# Altium PCB USF-IEEE-CS.PcbDoc
Units mil, origin at the board's own origin, x right, y up, seen from the top; angles counter-clockwise.
Board outline 1019 x 1400 mil, 2 copper layers (Top Layer, Bottom Layer); 18 components, 24 nets, 134 pads, 9 vias.
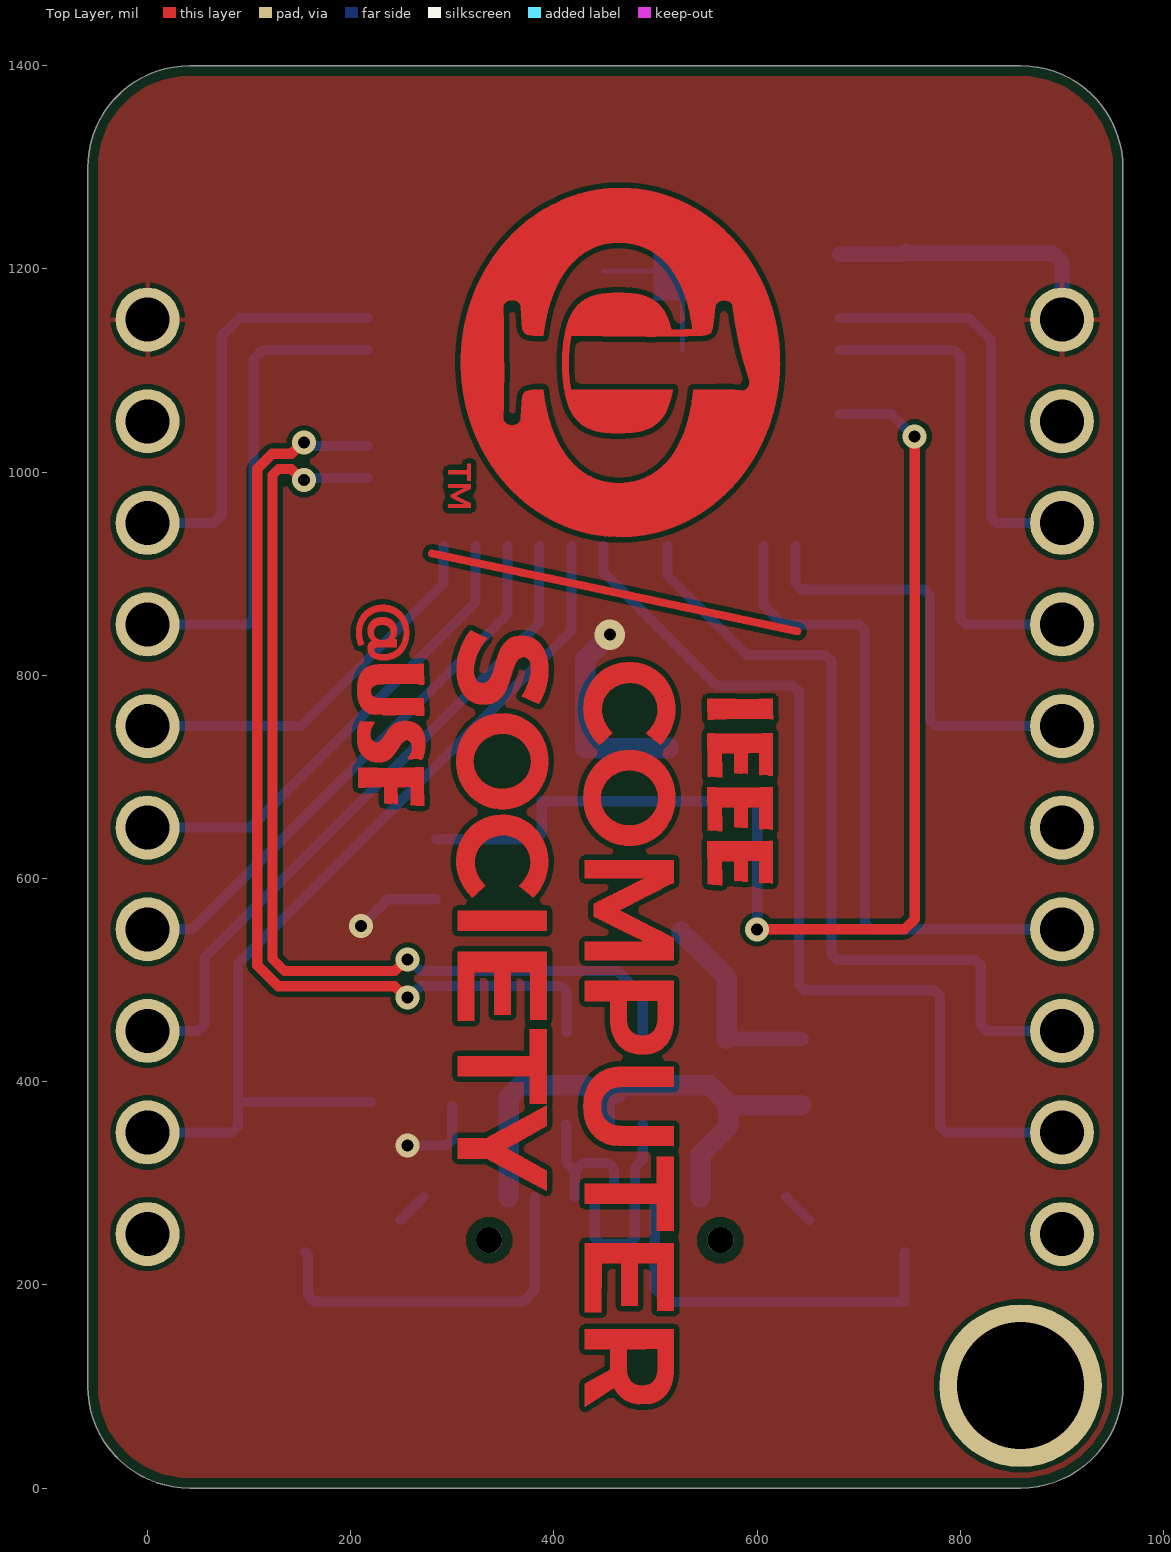
[diagram p0: Top Layer view]
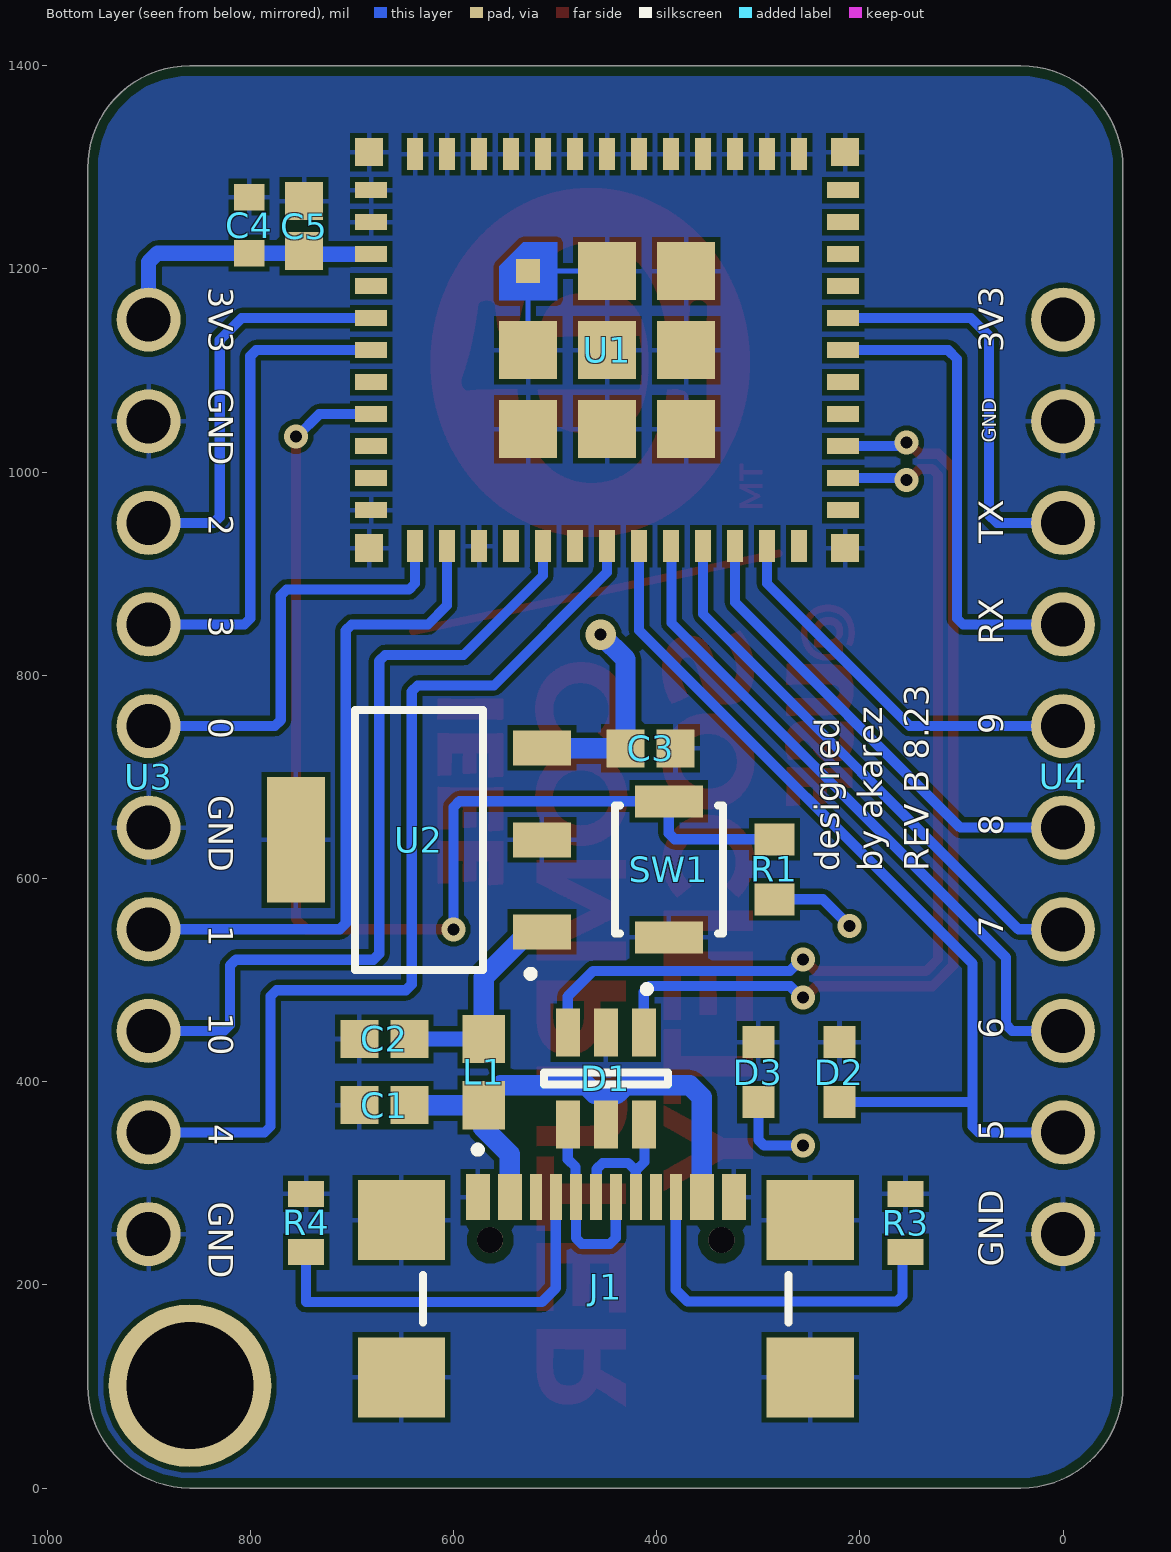
[diagram p1: Bottom Layer view, seen from below]
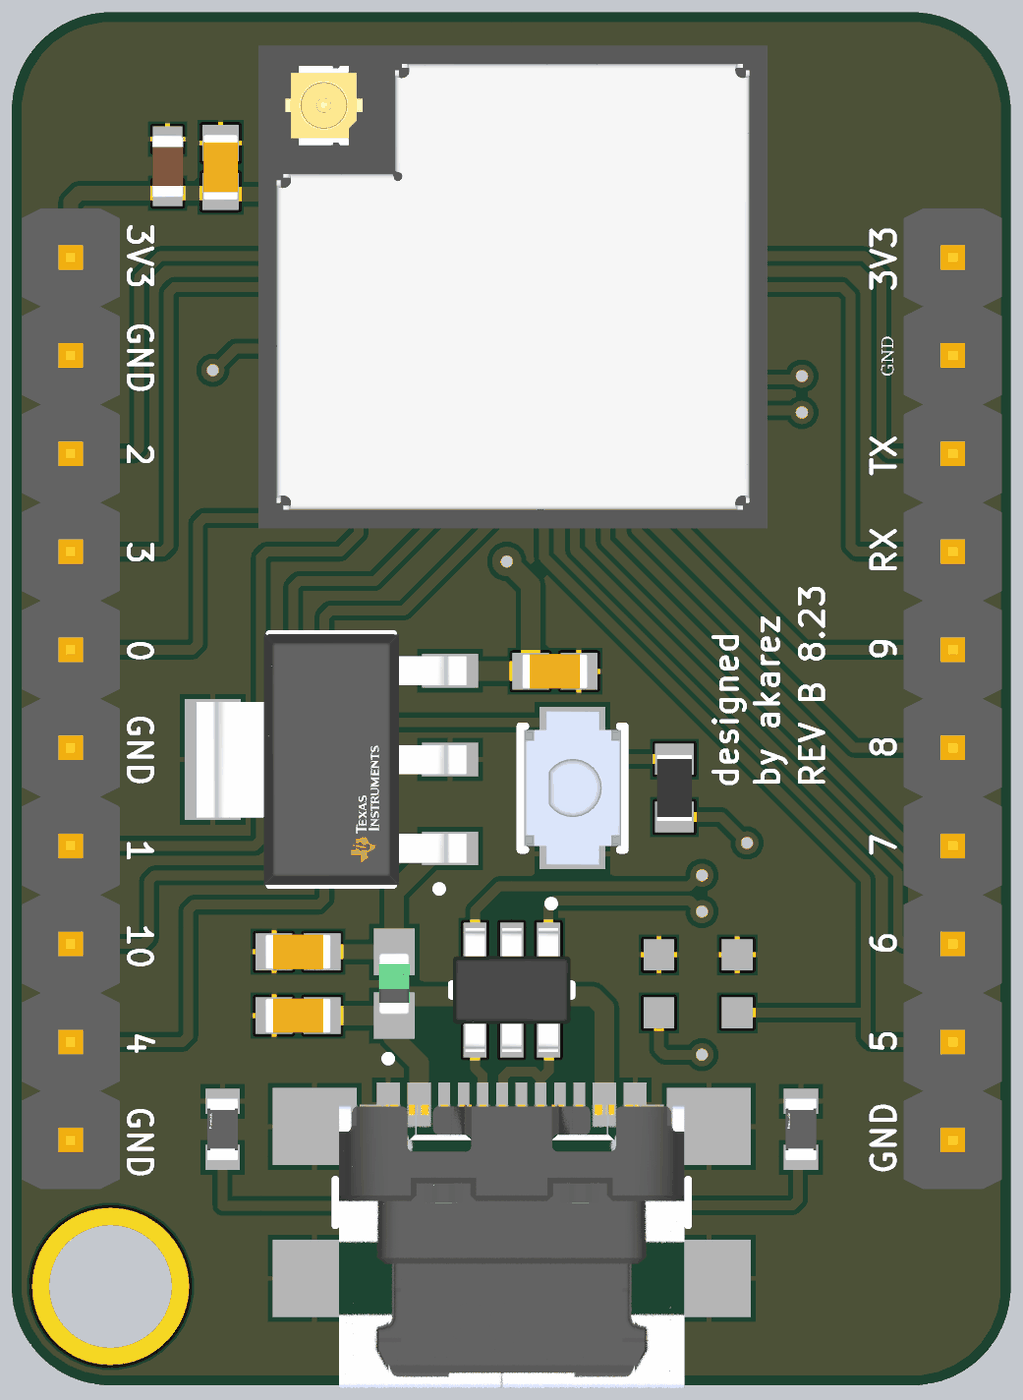
[diagram p2: 3D render of the assembled board from below, using the file's embedded part models]

## Layer stack, top to bottom
Top Solder: solder mask 0.4, Solder Resist, Dk 3.5
Top Layer: signal copper 1.4
Dielectric 1: dielectric 12.6, FR-4, Dk 4.8
Bottom Layer: signal copper 1.4
Bottom Solder: solder mask 0.4, Solder Resist, Dk 3.5

## Board outline
-58.94,100.32 ccw(c41.38,100.32) 41.38,0 859.29,0 ccw(c859.29,100.71) 960,100.71 960,1299.29 ccw(c859.29,1299.29) 859.29,1400 41.71,1400 ccw(c41.71,1299.29) -59,1299.29

## Design rules (kind name [scope] priority, off if disabled: settings)
BoardOutlineClearance [All] p1: gap=7.87 ignorepadtopadclearanceinfootprint=FALSE except(10: Arc-OutlineEdge Track-OutlineEdge SMDPad-OutlineEdge THPad-OutlineEdge Via-OutlineEdge Fill-OutlineEdge Poly-OutlineEdge Region-OutlineEdge Text-OutlineEdge)
Clearance [All] p1: gap=5 ignorepadtopadclearanceinfootprint=FALSE except(9.84: Arc-Hole Track-Hole SMDPad-Hole THPad-Hole Via-Hole Fill-Hole Poly-Hole Region-Hole Text-Hole)
ComponentClearance [All] p1: gap=5 collisioncheckmode=3 verticalgap=5 showdistances=TRUE
DiffPairsRouting [All] p1: maxlimit=10 minlimit=5 mostfreqgap=5 toplayer_minwidth=5 toplayer_maxwidth=1000 toplayer_prefwidth=5 bottomlayer_minwidth=5 bottomlayer_maxwidth=1000 bottomlayer_prefwidth=5 maxuncoupledlength=500
Height [All] p1: minheight=0 maxheight=71497.94 prefheight=500
HoleSize [All] p1: absolutevalues=TRUE maxlimit=248.03 minlimit=11.81 maxpercent=80.000 minpercent=20.000
HoleToHoleClearance [All] p1: gap=9.84 allowstackedmicrovias=FALSE
MinimumAnnularRing [All] p1: minimumring=3
MinimumSolderMaskSliver [All] p1: minsoldermaskwidth=0
PlaneClearance [All] p1: clearance=5
PlaneConnect PlaneConnectPowerPads [InPadClass('PowerPads')] p1: planeconnectstyle=Direct reliefexpansion=20 reliefentries=4 reliefconductorwidth=10 reliefairgap=10
PlaneConnect [All] p2: pad.planeconnectstyle=Relief pad.reliefexpansion=11.81 pad.reliefentries=4 pad.reliefconductorwidth=5 pad.reliefairgap=5 via.planeconnectstyle=Direct via.reliefexpansion=11.81 via.reliefentries=4 via.reliefconductorwidth=5 via.reliefairgap=5
PolygonConnect PolygonConnectPowerPads [All vs (InPadClass('PowerPads'))] p1: connectstyle=Direct reliefconductorwidth=10 reliefentries=4 polygonreliefangle="90 Angle" airgapwidth=10
PolygonConnect [All] p2: thpad.connectstyle=Relief thpad.reliefconductorwidth=5 thpad.reliefentries=4 thpad.polygonreliefangle="90 Angle" thpad.airgapwidth=5 smdpad.connectstyle=Relief smdpad.reliefconductorwidth=5 smdpad.reliefentries=4 smdpad.polygonreliefangle="90 Angle" smdpad.airgapwidth=5 via.connectstyle=Direct via.reliefconductorwidth=5 via.reliefentries=4 via.polygonreliefangle="90 Angle" via.airgapwidth=5
RoutingVias [All] p1: holewidth=11.81 width=23.62 viastyle="Through Hole" minholewidth=11.81 minwidth=23.62 maxholewidth=23.62 maxwidth=259.84
SilkToSilkClearance [All] p1: silktosilkclearance=0
SilkToSolderMaskClearance [IsPad] p1: minsilkscreentomaskgap=5 clearancetoexposedcopper=TRUE
SolderMaskExpansion [All] p1: expansion=2.95 istentingtop=FALSE
Width [All] p1: maxlimit=1000 minlimit=5 preferedwidth=5 minimp=50.000000 maximp=50.000000 favimp=50.000000
20 further rules are at their usual default settings.

## Classes and differential pairs
differential pair USB_D: +USB_D_P -USB_D_N
differential pair MCU_USB_D: +MCU_USB_D_P -MCU_USB_D_N

## Components (designator, comment, footprint, x,y, rotation, side; value= is the part's Value field where it differs from the comment)
C1 "Capacitor 100 nF +/-10% 50 V 0603" CAPC1608X90X40NL10T20 668,376.88 r0 bottom value=100nF
C2 "Capacitor 100 nF +/-10% 50 V 0603" CAPC1608X90X40NL10T20 668,442 r0 bottom value=100nF
C3 "Capacitor 100 nF +/-10% 50 V 0603" CAPC1608X90X40NL10T20 406,728 r180 bottom value=100nF
C4 "Capacitor 10µF +/-20% 10V 0603" CAPC0603(1608)100_L 801,1243 r270 bottom value=10µF
C5 "Capacitor 100 nF +/-10% 50 V 0603" CAPC1608X90X40NL10T20 747,1242 r270 bottom value=100nF
D1 "USBLC6-2SC6" STM-SOT23-6L_V 450,403 r270 bottom
D2 "LTST-C190AKT" LTST-C190AKT-2_V 220,409.4 r90 bottom
D3 "LTST-C190TBKT" LTST-C190TBKT-2_V 299.87,409.4 r90 bottom
J1 "USB4110-GF-A" FP-USB4110-GF-A-MFG 450,141.48 r180 bottom
L1 "LQG18HN2N2S00D" FP-LQG18HH_00-IPC_A 570,409.4 r90 bottom
R1 "Resistor 10k +/-1% 0603 100 mW" RESC1608X55X25ML10T15 284,609 r270 bottom value=10k
R3 "ERA-3AEB512V" FP-ERA3A-MFG 155,261 r90 bottom
R4 "ERA-3AEB512V" FP-ERA3A-MFG 745,261 r90 bottom
SW1 "B3U-1000P" FP-B3U-1000P-MFG 388,609 r90 bottom
U1 "ESP32-C3-MINI-1U-N4" XCVR_ESP32-C3-MINI-1U-N4 448.76,1120 r180 bottom
U2 "LM3940IMP-3.3/NOPB" FP-DCY0004A-IPC_C 634,638 r0 bottom
U3 "61301011121" FP-61301011121-MFG 900,700 r270 bottom
U4 "61301011121" FP-61301011121-MFG 0,700 r270 bottom

## Footprints (in the part's own frame and the unit in brackets; to place one, negate y for a bottom-side part, rotate by r counter-clockwise, add the part's x,y. Pads: shape width x height; smd on the part's side, far side on the other; paste and mask are expansions set on the pad)
CAPC0603(1608)100_L [mm] "Chip Capacitor, Body 1.6x0.8mm, Height 1.0mm, IPC High Density"
  rect 0.66x0.76 smd: 1(-0.7,0) 2(0.7,0)
  body extent -0.8,-0.4 0.8,0.4, height 0.95
CAPC1608X90X40NL10T20 [mm] "Chip Capacitor, 2-Leads, Body 1.70x0.90mm, IPC Medium Density"
  rect 0.95x0.95 smd: 1(-0.625,0) 2(0.625,0)
  body extent -0.85,-0.45 0.85,0.45, height 0.9
FP-61301011121-MFG [mm]
  round 1.6 hole 1.1 paste-1000 mask+0: 1(-11.43,0) 2(-8.89,0) 3(-6.35,0) 4(-3.81,0) 5(-1.27,0) 6(1.27,0) 7(3.81,0) 8(6.35,0) 9(8.89,0) 10(11.43,0)
  body extent -12.7,-1.27 12.7,1.27, height 8.54
FP-B3U-1000P-MFG [mm]
  rect 0.8x1.7 smd paste+0 mask+0: 1(-1.7,0) 2(1.7,0)
  silkscreen extent -1.6,-1.35 1.6,1.35, body extent -2,-1.26 2,1.24, height 1.6
FP-DCY0004A-IPC_C [mm]
  rect 1.454x0.873 smd paste+0 mask+0: 1(-3.075,2.3) 2(-3.075,0) 3(-3.075,-2.3)
  rect 1.454x3.132 smd paste+0 mask+0: 4(3.075,0)
  silkscreen extent -2.84,-3.25 1.6,3.4, body extent -3.5,-3.25 3.5,3.25, height 1.8
FP-ERA3A-MFG [mm]
  rect 0.65x0.9 smd paste+0 mask+0: 1(-0.725,0) 2(0.725,0)
  body extent -0.8,-0.4 0.8,0.4, height 0.55
FP-LQG18HH_00-IPC_A [mil]
  rect 47.48x41.66 smd paste+0 mask+0: 1(-32.52,0) 2(32.52,0)
  body extent -31,-16 31,16, height 37
FP-USB4110-GF-A-MFG [mm]
  rect 2.18x2 smd paste+0 mask+0: 1(-5.11,3.105) 2(5.11,3.105) 3(-5.11,-0.825) 4(5.11,-0.825)
  rect 0.6x1.15 smd paste+0 mask+0: A1-B12(-3.2,3.68) A4-B9(-2.4,3.68) B1-A12(3.2,3.68) B4-A9(2.4,3.68)
  rect 0.3x1.15 smd paste+0 mask+0: A5(-1.25,3.68) A6(-0.25,3.68) A7(0.25,3.68) A8(1.25,3.68) B5(1.75,3.68) B6(0.75,3.68) B7(-0.75,3.68) B8(-1.75,3.68)
  round 0.65 hole 0.65 unplated paste-1000 mask+0: M1(-2.89,2.605) M2(2.89,2.605)
  silkscreen extent -4.57,0.55 4.57,4.92, body extent -5.65,-3.67 5.65,4.01, height 3.21
LTST-C190AKT-2_V [mm] "SMD, 2-Leads, Body 1.6x0.8mm"
  rect 0.8x0.8 smd: 1(-0.75,0) 2(0.75,0)
  body extent -0.8,-0.4 0.8,0.4, height 0.8
LTST-C190TBKT-2_V [mm] "SMD, 2-Leads, Body 1.6x0.8mm"
  rect 0.8x0.8 smd: 1(-0.75,0) 2(0.75,0)
  body extent -0.8,-0.4 0.8,0.4, height 0.8
RESC1608X55X25ML10T15 [mm] "Chip Resistor, 2-Leads, Body 1.70x0.90mm, IPC Low Density"
  rect 0.8x1 smd: 1(-0.75,0) 2(0.75,0)
  body extent -0.85,-0.45 0.85,0.45, height 0.55
STM-SOT23-6L_V [mm] "SOT23, 6-Leads, Body 3.05x1.75mm, Pitch 0.95mm"
  rect 1.2x0.6 smd: 1(-1.15,0.95) 2(-1.15,0) 3(-1.15,-0.95) 4(1.15,-0.95) 5(1.15,0) 6(1.15,0.95)
  silkscreen extent -2.29,-1.55 0.15,1.55, body extent -1.6,-1.53 1.6,1.53, height 1.45
XCVR_ESP32-C3-MINI-1U-N4 [mm]
  rect 0.8x0.4 smd: 1(-5.9,4) 2(-5.9,3.2) 3(-5.9,2.4) 4(-5.9,1.6) 5(-5.9,0.8) 6(-5.9,0) 7(-5.9,-0.8) 8(-5.9,-1.6) 9(-5.9,-2.4) 10(-5.9,-3.2) 11(-5.9,-4) 25(5.9,-4) 26(5.9,-3.2) 27(5.9,-2.4) 28(5.9,-1.6) 29(5.9,-0.8) 30(5.9,0) 31(5.9,0.8) 32(5.9,1.6) 33(5.9,2.4) 34(5.9,3.2) 35(5.9,4)
  rect 0.4x0.8 smd: 12(-4.8,-4.9) 13(-4,-4.9) 14(-3.2,-4.9) 15(-2.4,-4.9) 16(-1.6,-4.9) 17(-0.8,-4.9) 18(0,-4.9) 19(0.8,-4.9) 20(1.6,-4.9) 21(2.4,-4.9) 22(3.2,-4.9) 23(4,-4.9) 24(4.8,-4.9) 36(4.8,4.9) 37(4,4.9) 38(3.2,4.9) 39(2.4,4.9) 40(1.6,4.9) 41(0.8,4.9) 42(0,4.9) 43(-0.8,4.9) 44(-1.6,4.9) 45(-2.4,4.9) 46(-3.2,4.9) 47(-4,4.9) 48(-4.8,4.9)
  rect 0.6x0.6 smd paste-1 mask+0: 49_1(-1.975,1.975)
  rect 1.45x1.45 smd: 49_2(0,1.975) 49_3(1.975,1.975) 49_4(1.975,0) 49_5(1.975,-1.975) 49_6(0,-1.975) 49_7(-1.975,-1.975) 49_8(-1.975,0) 49_9(0,0)
  rect 0.7x0.7 smd: 50(5.95,4.95) 51(5.95,-4.95) 52(-5.95,-4.95) 53(-5.95,4.95)
  Top Layer region: -1.25,1.25 -2.7,1.25 -2.7,2.1 -2.1,2.7 -1.25,2.7
  body extent -6.6,-6.25 6.6,6.25, height 2.55

## Part data
C1 C2 C3 C5: library part CMP-001-00017-6, "Chip Capacitor, 100 nF, +/- 10%, 50 V, 0603 (1608 Metric)", Capacitor Type=Ceramic, Case/Package=0603, Max Operating Temperature=125°C, Min Operating Temperature=-55°C, Tolerance=10%, Voltage Rating=50V, Mounting Technology=SM, Pins=2, RoHS Compliant=True
C4: library part CMP-001-00075-5, "Chip Capacitor, 10µF +/-20%, 10V, 0603, Thickness 1 mm", Case/Package=0603, Max Operating Temperature=85°C, Min Operating Temperature=-55°C, Tolerance=10%, Voltage Rating=10V, Mounting Technology=SMT, Pins=2
D1: library part CMP-2000-05378-1, "Very low capacitance ESD protection, 3.5 pF, -40 to 125 degC, 6-Pin SOT23, RoHS, Tape and Reel", Capacitance Value=3.5pF, Clamping Voltage=17V, Leakage Current=0.15uA, Manufacturer=STMicroelectronics, Operating Temp Range=-40Cto125C, Operating Temperature Classification=Automotive, Operating Temperature Max Deg. C=125C, Operating Temperature Min Deg. C=-40C, Package / Case=SOT-23, Package Description="6-Pin Small Outline Transistor, Body 2.925 x 1.625 mm, Pitch 0.95 mm", Package Reference=SOT23-6L, Peak Pulse Current=5A, Reverse Breakdown Voltage=6V, Reverse Stand-off Voltage=5V, Test Current (It)=1mA, Clamping Voltage (Max)=17V, Configuration=Dual, Datasheet URL=http://www.st.com/st-web-ui/static/active/en/resource/technical/document/datasheet/CD00050750.pdf, Datasheet Version="Rev. 5, 10/2011", Direction Type=Uni-Directional, Leakage Current (Max)=0.15uA, Manufacturer URL=http://www.st.com/, Mounting=SurfaceMount, Mounting Style=SurfaceMount, Number of Elements=1, Packaging=TapeandReel, Pin Count=6, Polarity=Uni-Directional, Product Depth (mm)=1.75mm, Product Height (mm)=1.3mm, Product Length (mm)=3.05mm, Rad Hardened=No, Suppressor Type=DiodeArrays, Working Voltage=5V, Working Voltage (Max)=5V
D2: library part CMP-007-00021-3, "LED Uni-Color Orange, 100 mW, 30 mA, -55 to 85 degC, 2-Pin SMD, RoHS, Tape and Reel", Case/Package=0603, Colour=Orange, Forward Current=20mA, Forward Voltage=2.1V, Manufacturer=Lite-On, Max Operating Temperature=85°C, Min Operating Temperature=-55°C, Package Description="2-Pin Surface Mount Device, Body 1.6 x 0.8 mm", Package Quantity=3000, Package Reference=LTST-C190AKT-2, Datasheet URL=http://datasheet.octopart.com/LTST-C190AKT-Lite-On-datasheet-11729267.pdf, Datasheet Version=Jan-03, Illumination Colour=Orange, Lens Style=Clear, Luminous Intensity=2mcd, Manufacturer URL=http://www.us.liteon.com/, Mounting Technology=SM, Nominal Vf=2.1V, Packaging=TapeandReel, Pins=2, RoHS Compliant=True, Viewing Angle=130degrees
D3: library part CMP-007-00026-3, "LED Uni-Color Blue, 76 mW, 20 mA, -20 to 80 degC, 2-Pin SMD, RoHS, Tape and Reel", Case/Package=0603, Colour=Blue, Forward Current=20mA, Forward Voltage=2.8V, Manufacturer=Lite-On, Max Operating Temperature=80°C, Min Operating Temperature=-20°C, Package Description="2-Pin Surface Mount Device, Body 1.6 x 0.8 mm", Package Quantity=3000, Package Reference=C190TBKT-2, Datasheet URL=http://optoelectronics.liteon.com/upload/download/DS-22-99-0224/S_110_LTST-C190TBKT(0630).pdf, Datasheet Version="Rev. K, 08/2011", Illumination Colour=Blue, Lens Style=Diffused, Luminous Intensity=28mcd, Manufacturer URL=http://www.us.liteon.com/, Mounting Technology=SM, Nominal Vf=3.3V, Packaging=TapeandReel, Pins=2, RoHS Compliant=True, Viewing Angle=130degrees
J1: library part CMP-002-00073-7, "Conn USB Type C RCP 16 POS 0.3mm/0.5mm Solder ST SMD 16 Terminal 1 Port T/R"
L1: library part CMP-006-00021-1, "General Purpose Inductor, 0.0022uH, 13.636%, 1 Element, Air-Core, SMD, 0603", Max Current Rating=1.1A, Max Operating Temperature=85°C, Min Operating Temperature=-40°C, Self Resonant Frequency=6GHz, Tolerance=13.636%, Pins=2, RoHS Compliant=Yes
R1: library part CMP-009-00017-5, "Chip Resistor, 10 KOhm, +/- 1%, 01 W, -55 to 155 degC, 0603 (1608 Metric)", Case/Package=0603, Max Operating Temperature=155°C, Min Operating Temperature=-55°C, Power=100mW, Tolerance=1%, Voltage Rating=50V, Mounting Technology=SM, Pins=2, RoHS Compliant=True
R3 R4: library part CMP-009-00177-2, "Res Thin Film 0603 5.1K Ohm 0.1% 1/10W ±25ppm/°C Molded SMD SMD Punched Carrier T/R"
SW1: library part CMP-2100-03586-2, "SWITCH TACTILE SPST-NO 0.05A 12V", Contact Current Rating=50mA, Contact Resistance=100mR, Insulation Resistance=100MR, Max Operating Temperature=70°C, Max Voltage Rating (DC)=12V, Min Operating Temperature=-25°C, Operating Force=1.5N, Package Quantity=1, Ratings="Dust Proof", Actuator Length=0.4mm, Actuator Type=Standard, Contact Material=Silver, Current Rating=50mA, Depth=2.5mm, Electrical Life=200000Cycles, Height=1.2mm, Illumination Type=Non-Illuminated, Lead Free="Lead Free", Length=4mm, Max Current Rating=50mA, Mechanical Life=200000Cycles, Mount="Surface Mount", Orientation=Straight, Packaging="Tape and Reel", Switch Function=Off-Mom, Switch Travel=0.15mm, Termination=SMD/SMT, Throw Configuration=SPST, Voltage Rating (DC)=12V, Weight=0.000776oz, Width=3mm
U1: library part CMP-005-000000-4, "Bluetooth, WiFi 802.11b/g/n, Bluetooth v5.0 Transceiver Module 2.412GHz ~ 2.484GHz Antenna Not Included, I-PEX Surface Mount", Package=None, Availability="In Stock", Check_prices=https://www.snapeda.com/parts/ESP32-C3-MINI-1U-N4/Espressif+Systems/view-part/?ref=eda, Component Type=Standard, Design Item ID=ESP32-C3-MINI-1U-N4, MF="Espressif Systems", MP=ESP32-C3-MINI-1U-N4, Pin Count=61, Price=None, Purchase-URL=https://pricing.snapeda.com/search/part/ESP32-C3-MINI-1U-N4/?ref=eda, SnapEDA_Link=https://www.snapeda.com/parts/ESP32-C3-MINI-1U-N4/Espressif+Systems/view-part/?ref=snap, Source=ESP32-C3-MINI-1U-N4.SchLib
U2: library part CMP-019-00049-2, "IC REG LDO 3.3V 1A SOT223"
U3 U4: library part CMP-002-00078-3, "Board Connector, 10 Contact(s), 1 Row(s), Male, Straight, 0.1 inch Pitch, Solder Terminal, Locking, Black Insulator, Plug", Max Operating Temperature=125°C, Min Operating Temperature=-40°C, Connector Type="BOARD CONNECTOR", Mounting Technology=Board, RoHS Compliant=Yes

## Free pads (board coordinates)
  round 160 hole 125: 7(859.29,100.71)

## Via types
v1: diameter 23.62, hole 11.81, Top Layer to Bottom Layer, tented top, 8 vias
v2: diameter 30, hole 11.81, Top Layer to Bottom Layer, tented top, 1 vias

## Nets (pads, with @x,y where several pads share a name; then routed paths per layer and width w, separated by ;. In a path a pad name is that pad's centre, name@x,y a point inside that pad or via, vN(x,y) a via of type N, cw(c..) or ccw(c..) an arc to the next point about the centre after c; other vN are vias at no path point)
3V3: C3.1 C4.2 C5.2 D3.1 R1.2 U1.3 U2.3 U3.1 U4.1 | length 648.2
  Bottom Layer w10: v1(210,553) 236.52,579.47 R1.2 ; v1@258,337 294.01,337 299.87,342.86 D3.1@299.87,375.86
  Bottom Layer w15: U1.3 744.09,1214.49 C5.2 748.95,1215.44 C4.2 891.21,1215.44 900,1206.65 U3.1
  Bottom Layer w20: v2(455,840) 430.61,815.61 C3.1 430.88,728.28 512.66,728.28 U2.3
  other v1: 256,337
5V: C2.1 L1.2 U2.1 | length 198.8
  Bottom Layer w15: L1.2 C2.1@643.39,441.92
  Bottom Layer w20: U2.1@525,548 525,546.82 531.56,540.26 532.74,540.26 570,503 L1.2
EN: R1.1 SW1.2 U1.8 | length 1189.7
  Top Layer w10: v1(600,550) 745,550 755,560 v1(755,1035)
  Bottom Layer w10: R1.1 382.14,638.53 388,644.39 SW1.2 594.14,675.93 600,670.07 v1(600,550) ; U1.8 732.02,1057.01 754.03,1035 v1(755,1035)
GND: C1.2 C2.2 C3.2 C4.1 C5.1 D1.2 D2.2 D3.2 J1.1 J1.2 J1.3 J1.4 J1.A1-B12 J1.B1-A12 R3.2 R4.2 SW1.1 U1.1 U1.2 U1.11 U1.14 U1.36 U1.37 U1.38 U1.39 U1.40 U1.41 U1.42 U1.43 U1.44 U1.45 U1.46 U1.47 U1.48 U1.49_1 U1.49_2 U1.49_3 U1.49_4 U1.49_5 U1.49_6 U1.49_7 U1.49_8 U1.49_9 U1.50 U1.51 U1.52 U1.53 U2.2 U2.4 U3.2 U3.6 U3.10 U4.2 U4.10 | length 219.5
  Bottom Layer w5: U1.49_2 U1.49_1 U1.49_8
  Bottom Layer w10: J1.2 J1.2@271.46,286.36 ; J1.1@628.54,286.36 J1.1
IO0: U1.12 U3.5 | length 429.1
  Bottom Layer w10: U1.12 637.73,890.28 643.59,884.42 764.14,884.42 770,878.57 770,755.86 775.86,750 U3.5
IO1: U1.13 U3.7 | length 653
  Bottom Layer w10: U1.13 606.24,868.76 625,850 700.14,850 706,844.14 706,555.86 711.86,550 U3.7
IO2: U1.5 U3.3 | length 404.4
  Bottom Layer w10: U1.5 808.5,1151.5 830,1130 830,955.86 835.86,950 U3.3
IO3: U1.6 U3.4 | length 482.1
  Bottom Layer w10: U1.6 794.14,1120 800,1114.14 800,855.86 805.86,850 U3.4
IO4: U1.18 U3.9 | length 949.4
  Bottom Layer w10: U1.18 448.76,901.24 560,790 635.14,790 641,784.14 641,495.86 646.86,490 774.14,490 780,484.14 780,355.86 785.86,350 U3.9
IO5: D2.1 U1.19 U4.9 | length 929.6
  Bottom Layer w10: U4.9 83.14,350 89,355.86 89,379.87 ; D2.1 89,379.87 ; U1.19 417.26,844.26 89,516 89,379.87
IO6: U1.20 U4.8 | length 666.2
  Bottom Layer w10: U4.8 50.14,450 56,455.86 56,522 385.38,851.38 385.38,926.7 U1.20
IO7: U1.21 U4.7 | length 549.6
  Bottom Layer w10: U4.7 43.93,550 354.27,860.34 U1.21
IO8: U1.22 U4.6 | length 469.9
  Bottom Layer w10: U4.6 101,650 322.77,871.77 U1.22
IO9: U1.23 U4.5 | length 386.2
  Bottom Layer w10: U4.5 151,750 291.28,890.28 U1.23
IO10: U1.16 U3.8 | length 805.8
  Bottom Layer w10: U1.16 511.75,898.25 590,820 667.14,820 673,814.14 673,525.86 678.86,520 814.14,520 820,514.14 820,455.86 825.86,450 U3.8
MCU_USB_D_N: D1.3 U1.26 | length 997.7
  Top Layer w10: v1(154,992) 152.33,992 141.33,1003 128.86,1003 123,997.14 123,520.64 134.71,508.94 243.33,508.94 254.4,520 v1(256,520)
  Bottom Layer w10: v1(154,992) 156.02,994.02 U1.26 ; v1@259.39,517.39 260.28,517.39 268.67,509 462.33,509 487.4,483.93 D1.3
MCU_USB_D_P: D1.1 U1.27 | length 973.6
  Top Layer w10: v1(154,1029) 152.33,1029 141.33,1018 122.64,1018 108,1003.36 108,514.43 128.49,493.94 243.03,493.94 253.51,483.45 v1@255.7,483.45
  Bottom Layer w10: v1(154,1029) 157.69,1029 161.17,1025.51 U1.27 ; v1@255.7,483.45 257.82,483.45 268.37,494 406.74,494 412.6,488.14 D1.1
  other v1: 256,483
NetJ1_A5: J1.A5 R4.1 | length 390.7
  Bottom Layer w10: J1.A5 499.21,196.79 513,183 745.14,183 745.14,232.31 R4.1
NetJ1_B5: J1.B5 R3.1 | length 366
  Bottom Layer w10: R3.1 158,229.46 158,189.31 163.86,183.46 369.46,183.46 381.1,195.1 J1.B5
RX: U1.30 U4.4 | length 477.9
  Bottom Layer w10: U4.4 98.45,850 104.31,855.86 104.31,1111.31 113,1120 U1.30
TX: U1.31 U4.3 | length 403
  Bottom Layer w10: U4.3 65,950 73,958 73,1134 90.5,1151.5 U1.31
USB_D_N: D1.4 J1.A7 J1.B7 | length 199.3
  Bottom Layer w10: J1.A7 440.16,246.1 446.02,240.24 473.65,240.24 479.51,246.1 J1.B7@479.51,286.34 ; J1.B7 479.72,286.56 479.72,315.92 487.4,323.6 D1.4
USB_D_P: D1.6 J1.A6 J1.B6 | length 147.2
  Bottom Layer w10: D1.6@411.6,357.72 412,357.32 412,320.94 420.47,312.47 ; J1.B6 420.47,312.47 ; J1.A6 458.94,287.27 458.94,314.14 453.08,320 428,320 420.47,312.47
VUSB: C1.1 D1.5 J1.A4-B9 J1.B4-A9 L1.1 | length 539.6
  Bottom Layer w20: J1.B4-A9 355.51,384.63 367.23,396.35 430.62,396.35 438.97,388 450,388 ; D1.5 450,388 ; J1.A4-B9 544.49,328.49 571.45,355.45 L1.1@571.45,376.88 ; C1.1 L1.1@571.45,376.88 ; 450,388 461.03,388 469.38,396.35 553.44,396.35 570,379.79 L1.1 L1.1@571.45,376.88
pads on no net: J1.A8 J1.B8 J1.M1 J1.M2 U1.4 U1.7 U1.9 U1.10 U1.15 U1.17 U1.24 U1.25 U1.28 U1.29 U1.32 U1.33 U1.34 U1.35

## Polygon pours and split planes (outlines as drawn)
3V3 on Top Layer "3V3_L01_P002" (solid, pour order 2): -110,1400 1000,1400 1000,0 -110,0
GND on Bottom Layer "GND_L02_P000" (solid, remove dead copper, pour order 0): -110,1400 1010,1400 1010,0 -110,0

## Other copper
Top Layer:
  drawing of 27 lines, arcs and shapes, not listed

## Silkscreen, mask and mechanical layers (free items; w line width, h text height)
Bottom Overlay:
  text "3V3" at 841,1181.99 h24 r90
  text "3V3" at 59,1118.01 h24 r270
  text "GND" at 841,1081.99 h24 r90
  text "GND" at 60.64,1028.65 h24 r270
  text "2" at 841,958 h24 r90
  text "TX" at 59,930.01 h24 r270
  text "3" at 841,858 h24 r90
  text "RX" at 59,830.01 h24 r270
  text "0" at 841,758 h24 r90
  text "9" at 59,742 h24 r270
  text "GND" at 841,681.99 h24 r90
  text "8" at 59,642 h24 r270
  text "REV B 8.23" at 132,607 h24 r270
  text "by akarez" at 178,607 h24 r270
  text "designed" at 220,607 h24 r270
  text "1" at 841,554 h24 r90
  text "7" at 59,542 h24 r270
  text "10" at 841,467.99 h24 r90
  text "6" at 59,442 h24 r270
  text "4" at 841,358 h24 r90
  text "5" at 59,342 h24 r270
  text "GND" at 841,281.99 h24 r90
  text "GND" at 59,218.01 h24 r270
Mechanical 1:
  the board outline again, w10